# EAGLE board Generic MOSFET LVD (EAGLE 7.5.0)
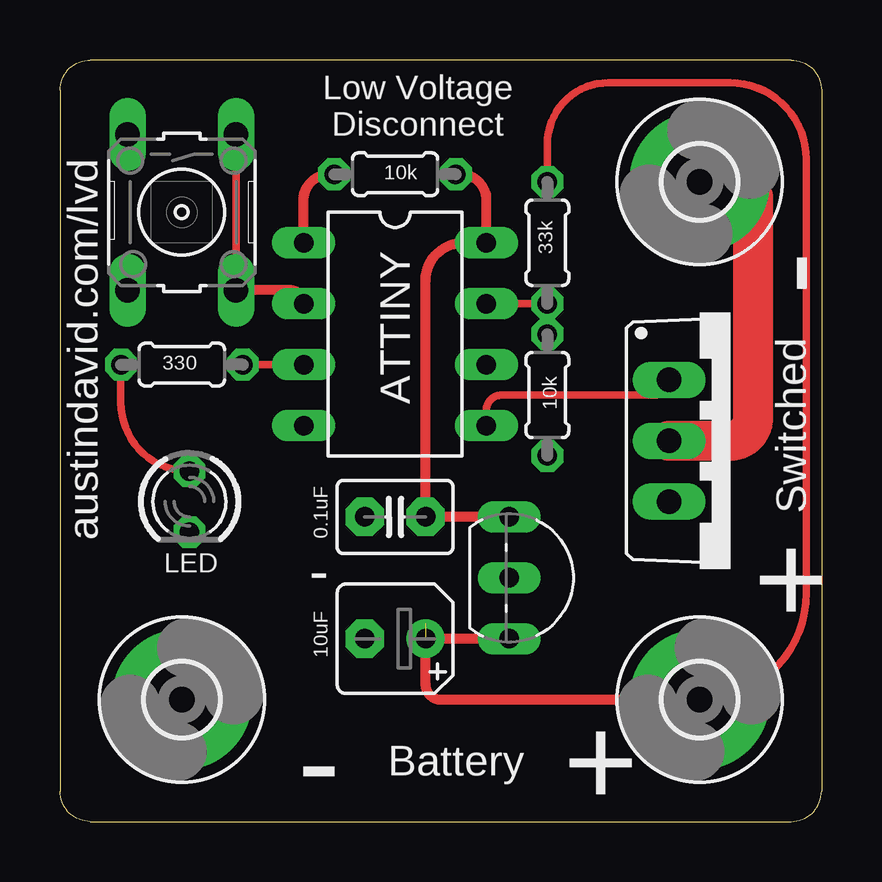
[diagram p0: board, top side]
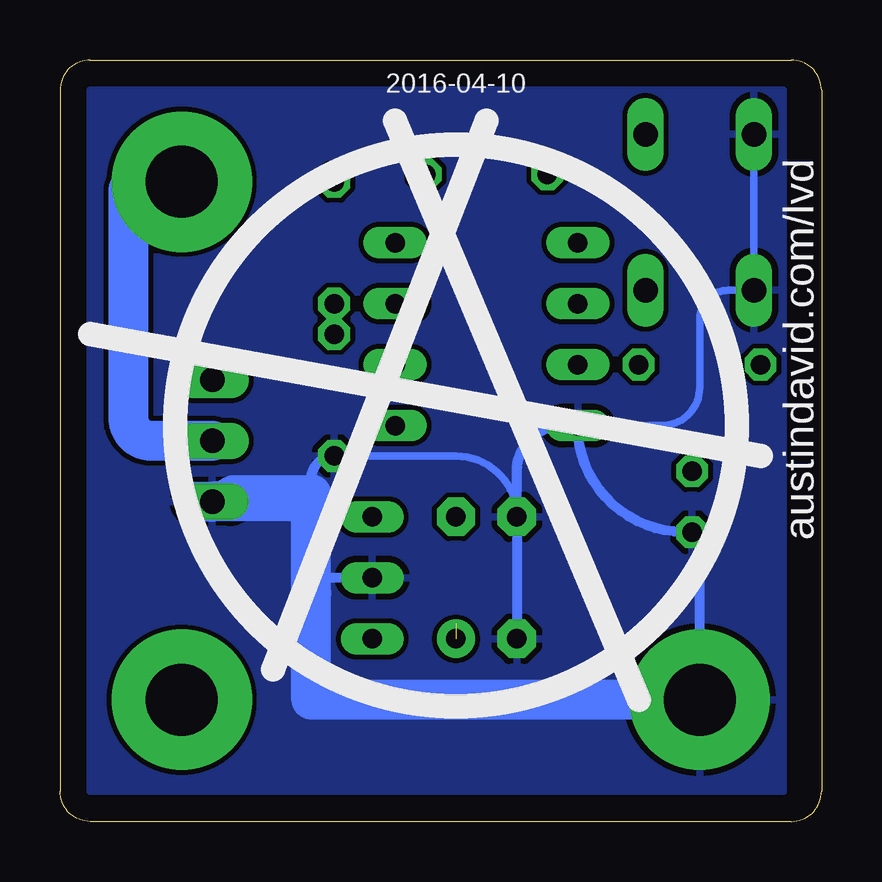
[diagram p1: board, bottom side, seen from below]

Size 31.75 x 31.75 mm. Coordinates in mm from the lower left corner, seen from the top.
Outline: 1.27,0 30.48,0 arc90 31.75,1.27 31.75,30.48 arc90 30.48,31.75 1.27,31.75 arc90 0,30.48 0,1.27 arc90 1.27,0
Copper layers (1*16): Top 0.035mm / dielectric 1.5mm / Bottom 0.035mm
Design rules "default": minimum track width 10mil, minimum drill 24mil, track to track 8mil, track to pad 8mil, pad to pad 8mil, via to via 8mil, smd to smd 8mil, copper to edge 40mil, drill to drill 8mil, minimum pad ring 10mil, minimum via ring 8mil, stop-mask expansion 4mil, vias tented up to drill 0mil, thermal gap 10mil

## Footprints (pad centres in the part's own frame; a part is rotated, then mirrored left to right if it is on the bottom)
DIL08 = drill 0.813 long: 1 -3.81,-3.81; 2 -1.27,-3.81; 3 1.27,-3.81; 4 3.81,-3.81; 5 3.81,3.81; 6 1.27,3.81; 7 -1.27,3.81; 8 -3.81,3.81
B45181A = drill 0.813 pad 1.6: + -1.27,0 | drill 0.813 pad 1.6 octagon: - 1.27,0
C2.5-3 = drill 0.813 pad 1.6 octagon: 1 -1.27,0; 2 1.27,0
3,0-PAD = drill 3 pad 5.842: B3,0 0,0
LED3MM = drill 0.813 octagon: A -1.27,0; K 1.27,0
TO220BV = drill 1.016 long: D 0,-2.54; G -2.54,-2.54; S 2.54,-2.54
TO92- = drill 0.813 long: 1 2.54,0; 2 0,0; 3 -2.54,0
0204/5 = drill 0.813 octagon: 1 -2.54,0; 2 2.54,0
B3F-10XX = drill 1.016 long: 1 -3.251,2.261; 2 3.251,2.261; 3 -3.251,-2.261; 4 3.251,-2.261

## Placement (x,y rotation side)
ATTINY  TINY13-20PU  [DIL08]  13.97,20.32 270 top
C1  10uF  [B45181A]  13.97,7.62 180 top
C2  0.1uF  [C2.5-3]  13.97,12.7 180 top
GND_BATT  MOUNT-PAD-ROUND3.0  [3,0-PAD]  5.08,5.08 0 top
GND_SWITCHED  MOUNT-PAD-ROUND3.0  [3,0-PAD]  26.67,26.67 8.6 top
LED  TLLR4400  [LED3MM]  5.4,13.33 270 top
Q1  IRF520  [TO220BV]  27.94,15.88 270 top
Q2  2N5484  [TO92-]  18.73,10.16 270 top
R1  10k  [0204/5]  13.97,26.99 180 top
R2  330  [0204/5]  5.08,19.05 180 top
R3  33k  [0204/5]  20.32,24.13 270 top
R4  10k  [0204/5]  20.32,17.78 90 top
S1  [B3F-10XX]  5.08,25.4 270 top
V_BATT  MOUNT-PAD-ROUND3.0  [3,0-PAD]  26.67,5.08 0 top

## Library data of the parts
ATTINY = atmel; MPN: ATTINY13-20PU; OC_FARNELL: 9171550; OC_NEWARK: 96K6521
C1 = rcl
C2 = capacitor-wima
GND_BATT GND_SWITCHED V_BATT = holes
LED = led; MF: VISHAY SEMICONDUCTOR; OC_FARNELL: 1612437
Q1 = transistor-power
Q2 = transistor-fet
R1-R4 = resistor
S1 = switch-omron; MPN: B3F-1000; OC_FARNELL: 176432; OC_NEWARK: 36M3542

## Nets
BUTTON: ATTINY.2 S1.1 S1.2
GND: ATTINY.4 C1.- C2.2 GND_BATT.B3,0 LED.K Q1.S Q2.2 R4.1 S1.3 S1.4
GND_SWITCHED: GND_SWITCHED.B3,0 Q1.D
LED: ATTINY.3 R2.1
N$1: ATTINY.1 R1.2
N$4: LED.A R2.2
NC: ATTINY.6
RELAY: ATTINY.5 Q1.G
V_BATT: C1.+ Q2.1 R3.1 V_BATT.B3,0
V_SENSE: ATTINY.7 R3.2 R4.2
VCC: ATTINY.8 C2.1 Q2.3 R1.1

## Tracks (layer width: path | path; a pad name or v marks a point on that pad's centre or on a via)
BUTTON
  Top 0.305: S1.1 S1.2
  Top 0.406: ATTINY.2 arc90 9.6,22.15 S1.2
GND
  Bottom 0.305: R4.1 15.24,15.24 arc90 C2.2 | Q1.S arc90 24.45,14.29 21.27,14.29 21.27,13.65 | ATTINY.4 6.67,16.51 arc-90 5.08,18.1 5.08,20.96 arc90 3.89,22.15 S1.4 S1.3
  Bottom 0.406: GND_BATT.B3,0 5.08,11.75 arc-90 LED.K 5.71,12.07 arc90 ATTINY.4 10.79,16.51 arc-90 12.7,14.61 C2.2 C1.- | 21.27,14.29 arc90 R4.1 | Q2.2 20.64,10.16 arc-90 21.27,9.52
  Bottom 1.676: GND_BATT.B3,0 21.27,5.08 21.27,9.52 21.27,13.33 | 21.27,13.65 21.27,13.33 | 21.27,13.33 Q1.S 26.03,13.33
  pour Bottom: 30.48,1.27 1.59,1.27 1.59,30.48 30.48,30.48
GND_SWITCHED
  Top 1.016: GND_SWITCHED.B3,0 28.26,26.67 arc-90 28.89,26.04
  Top 1.676: 28.89,26.04 28.89,16.83 arc-90 27.94,15.88 Q1.D
  Bottom 1.016: 28.89,26.35 26.99,26.35 arc-90 GND_SWITCHED.B3,0
  Bottom 1.676: Q1.D 27.94,15.88 arc90 28.89,16.83 28.89,26.35
LED
  Top 0.305: ATTINY.3 R2.1
N$1
  Top 0.406: ATTINY.1 10.16,26.04 arc-90 R1.2
N$4
  Top 0.305: R2.2 2.54,17.46 arc90 LED.A
RELAY
  Top 0.305: ATTINY.5 17.78,17.14 arc-90 18.41,17.78 24.77,17.78 arc90 Q1.G
V_BATT  (1 unrouted)
  Top 0.305: R3.1 20.32,28.26 arc-90 22.86,30.8 27.94,30.8 arc-90 31.11,27.62 31.11,9.52 arc-90 V_BATT.B3,0
  Top 0.406: V_BATT.B3,0 15.88,5.08 arc-90 15.24,5.71 C1.+ Q2.1
V_SENSE
  Top 0.305: ATTINY.7 R3.2 R4.2
VCC
  Top 0.406: R1.1 arc-90 17.78,26.04 ATTINY.8 16.83,24.13 arc90 15.24,22.54 C2.1 Q2.3

## Text on the board
tNames: Low Voltage / Disconnect | - | austindavid.com/lvd | Switched | - | + | - | Battery | +
bNames: 2016-04-10 | austindavid.com/lvd